# EAGLE board RH013.1 (EAGLE 7.1.0)
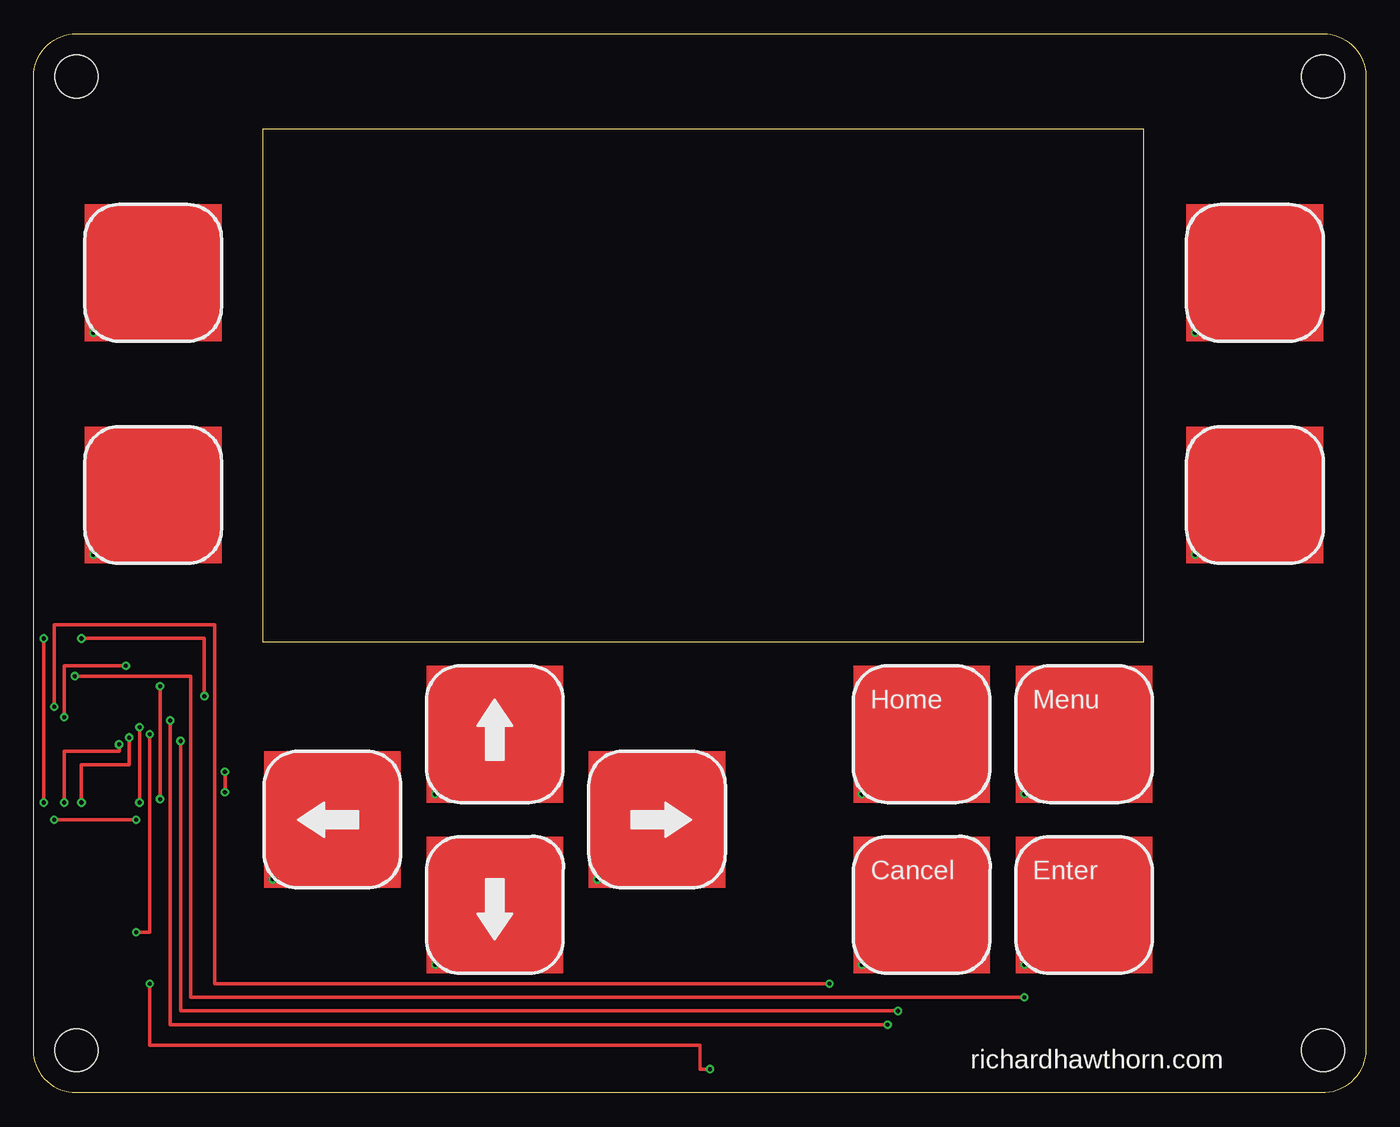
[diagram p0: board, top side]
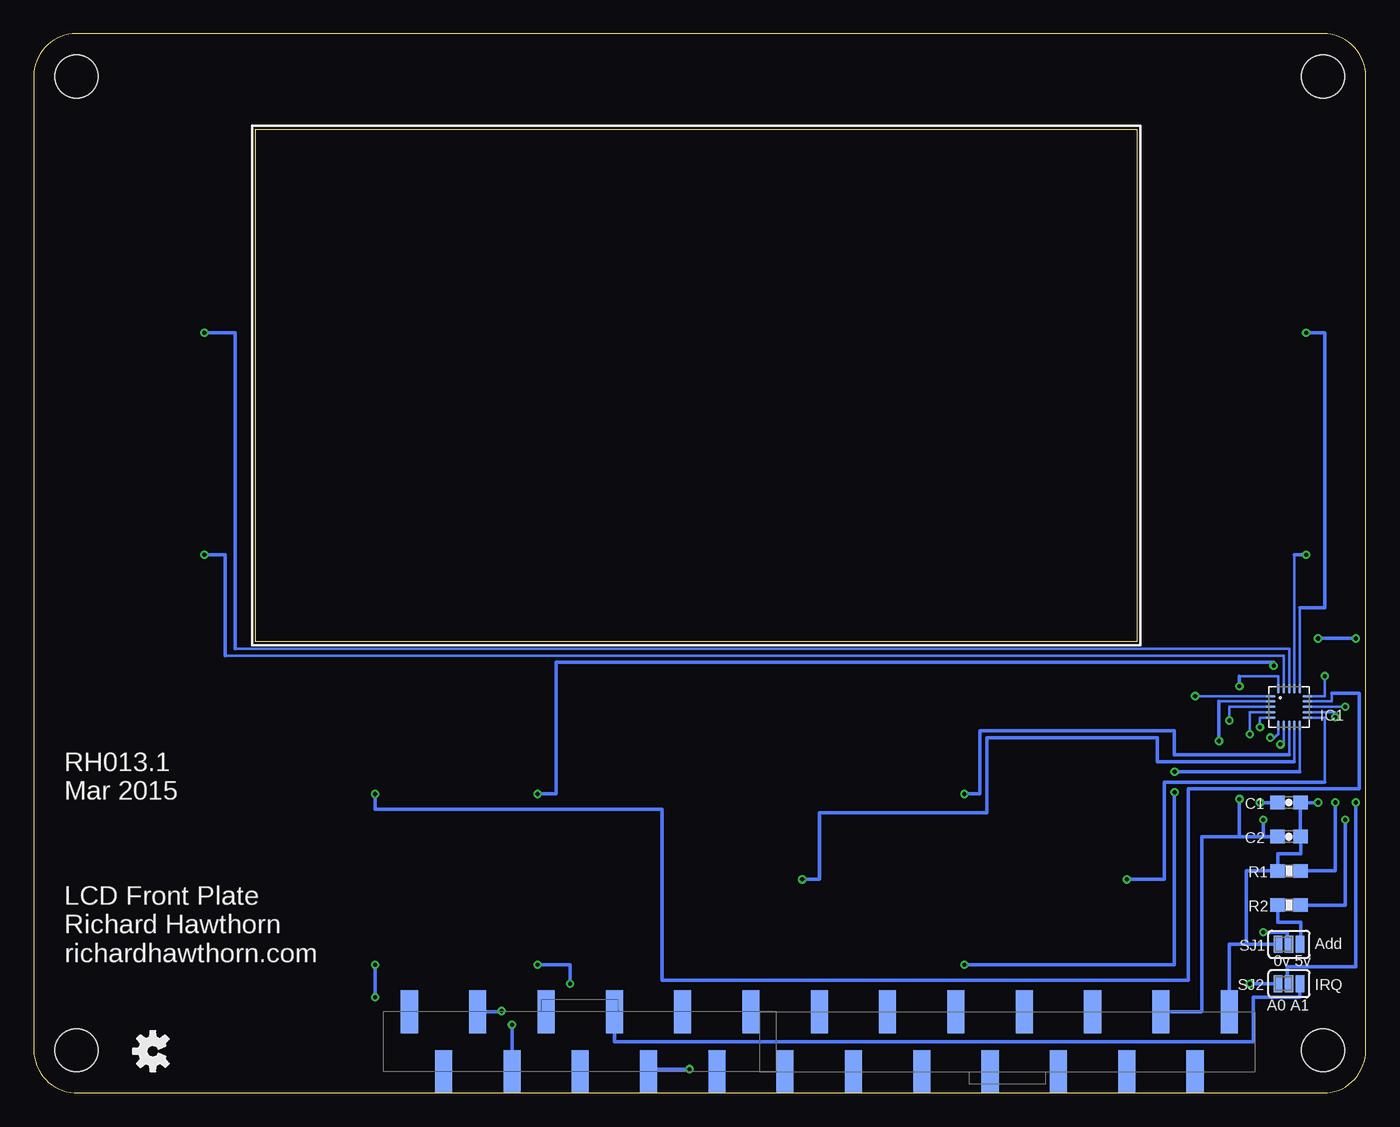
[diagram p1: board, bottom side, seen from below]

Size 99.06 x 78.74 mm. Coordinates in mm from the lower left corner, seen from the top.
Outline: 0,3.17 0,75.56 arc-90 3.17,78.74 95.89,78.74 arc-90 99.06,75.56 99.06,3.17 arc-90 95.76,0 3.17,0 arc-90 0,3.17
Outline: 17.02,71.63 17.02,33.53 82.56,33.53 82.56,71.63 17.02,71.63
Copper layers (1*16): Top 0.035mm / dielectric 1.5mm / Bottom 0.035mm
Design rules "ITEADstudio_DRC *": minimum track width 12mil, minimum drill 12mil, track to track 6mil, track to pad 6mil, pad to pad 6mil, via to via 6mil, smd to smd 0mil, copper to edge 10mil, drill to drill 10mil, minimum pad ring 10mil, minimum via ring 6mil, stop-mask expansion 2mil, vias tented up to drill 100mil, thermal gap 15mil
Net classes: 1 power: width 0.381 mm, clearance 0.254 mm
Holes 3.2 mm at 3.17,3.17 95.89,3.17 3.17,75.56 95.89,75.56
tRestrict: area 24.3,8.9 to 29.1,12.8; area 5.8,16.9 to 6.9,18.5; area 5.2,9.7 to 6.7,10.4
bRestrict: area 27.4,17.7 to 29.2,18.7; area 21.1,13.8 to 22.9,14.9; area 21.6,12.6 to 22.1,13.2; area 20.7,12.6 to 21.2,13.2; area 20.2,12.8 to 20.7,13.5; area 20.1,13.4 to 20.6,14; area 26.5,18.9 to 27.1,19.5; area 26.5,17.9 to 27.1,18.5; area 27.5,19.1 to 28,19.8; area 27.9,18.8 to 29.1,19.6

## Footprints (pad centres in the part's own frame; a part is rotated, then mirrored left to right if it is on the bottom)
0603-CAP = smd 1.1 x 1: 1 -0.85,0; 2 0.85,0
QFN-20-0.4MM-V2 = smd 0.75 x 0.195: 1 -1.367,0.8; 2 -1.367,0.4; 3 -1.367,0; 4 -1.367,-0.4; 5 -1.367,-0.8; 11 1.375,-0.8; 12 1.375,-0.4; 13 1.375,0; 14 1.375,0.4; 15 1.375,0.8 | smd 0.195 x 0.75: 6 -0.795,-1.372; 7 -0.395,-1.372; 8 0.005,-1.372; 9 0.405,-1.372; 10 0.805,-1.372; 16 0.81,1.372; 17 0.41,1.372; 18 0.01,1.372; 19 -0.39,1.372; 20 -0.79,1.372
0603-RES = smd 1.1 x 1: 1 -0.85,0; 2 0.85,0
SJ_3_PASTE1&2 = smd 0.635 x 1.27: 1 -0.813,0; 2 0,0; 3 0.813,0
74099-14 = smd 1.27 x 3.175: 1 -16.51,-2.223; 2 -13.97,2.223; 3 -11.43,-2.223; 4 -8.89,2.223; 5 -6.35,-2.223; 6 -3.81,2.223; 7 -1.27,-2.223; 8 1.27,2.223; 9 3.81,-2.223; 10 6.35,2.223; 11 8.89,-2.223; 12 11.43,2.223; 13 13.97,-2.223; 14 16.51,2.223
74099-11 = smd 1.27 x 3.175: 1 -12.7,-2.223; 2 -10.16,2.223; 3 -7.62,-2.223; 4 -5.08,2.223; 5 -2.54,-2.223; 6 0,2.223; 7 2.54,-2.223; 8 5.08,2.223; 9 7.62,-2.223; 10 10.16,2.223; 11 12.7,-2.223

## Placement (x,y rotation side)
C1  0.1uF  [0603-CAP]  5.71,21.59 0 bottom
C2  0.1uF  [0603-CAP]  5.71,19.05 0 bottom
IC1  MPR121  [QFN-20-0.4MM-V2]  5.71,28.7 0 bottom
R1  75k  [0603-RES]  5.71,16.51 0 bottom
R2  10K  [0603-RES]  5.71,13.97 0 bottom
SJ1  [SJ_3_PASTE1&2]  5.71,11.05 0 bottom
SJ2  [SJ_3_PASTE1&2]  5.71,8.13 0 bottom
U$3  [OSHW-LOGO-S]  90.2,3.1 90 bottom
X1  C-GRID-14-74099  [74099-14]  26.67,3.81 0 bottom
X2  C-GRID-11-74099  [74099-11]  58.42,3.81 180 bottom

## Library data of the parts
C1 C2 = SparkFun-Capacitors; PROD_ID: CAP-00810
IC1 = SparkFun-Sensors
R1 = SparkFun
R2 = SparkFun-Resistors; PROD_ID: RES-00824
SJ1 SJ2 = SparkFun-Passives
U$3 = SparkFun-Aesthetics
X1 X2 = con-molex; OC_FARNELL: unknown; OC_NEWARK: unknown

## Nets
3.3V: C2.1 IC1.20 R2.2 X1.12
A0: SJ2.1 X2.4
A1: SJ2.3 X2.5
A2: X2.6
A3: X2.7
A4_SDA: IC1.3 X2.8
A5_SCL: IC1.2 X2.9
A6: X2.10
A7: X2.11
D0_RX: X1.11
D1_TX: X1.10
D2: X1.9
D3: X1.8
D4: X1.7
D5: X1.6
D6: X1.5
D7: X1.4
D8: X1.3
D9: X1.2
D10_SS: X1.1
D11_MOSI: X2.1
D12_MISO: X2.2
D13_SCK: X2.3
GND [power]: C1.2 C2.2 IC1.6 R1.1 SJ1.1 X1.14
KEY0: IC1.8
KEY1: IC1.9
KEY2: IC1.10
KEY3: IC1.11
KEY4: IC1.12
KEY5: IC1.13
KEY6: IC1.14
KEY7: IC1.15
KEY8: IC1.16
KEY9: IC1.17
KEY10: IC1.18
KEY11: IC1.19
N$1: IC1.4 SJ1.2
N$2: R2.1 SJ1.3
PWR [power]: X1.13
REXT: IC1.7 R1.2
VREG: C1.1 IC1.5
~IRQ: IC1.1 SJ2.2

## Tracks (layer width: path | path; a pad name or v marks a point on that pad's centre or on a via)
3.3V  (via drill 0.3)
  Top 0.254: v9.4,21.84 v9.4,30.23 | v1.52,20.32 v7.62,20.32
  Bottom 0.203: 9.4,30.99 6.5,30.99 IC1.20
  Bottom 0.254: X1.12 12.19,6.03 12.19,19.05 9.4,19.05 | C2.1 7.62,19.05 | 7.62,19.05 9.4,19.05 | 9.4,19.05 v9.4,21.84 | v9.4,30.23 9.4,30.99 | R2.2 1.52,13.97 v1.52,20.32 | v7.62,20.32 7.62,19.05
A0  (via drill 0.3)
  Top 0.254: v50.29,1.78 49.53,1.78 49.53,3.56 8.64,3.56 v8.64,8.13
  Bottom 0.254: X2.4 53.34,1.78 v50.29,1.78 | v8.64,8.13 SJ2.1
A1
  Bottom 0.254: X2.5 55.88,3.81 8.38,3.81 8.38,7.11 4.9,7.11 SJ2.3
A4_SDA  (via drill 0.3)
  Top 0.254: v63.5,5.08 10.16,5.08 v10.16,27.69
  Bottom 0.203: v10.16,27.69 10.16,28.7 IC1.3
  Bottom 0.254: X2.8 v63.5,5.08
A5_SCL  (via drill 0.3)
  Top 0.254: v64.26,6.1 10.92,6.1 v10.92,26.16
  Bottom 0.203: 10.92,29.1 IC1.2
  Bottom 0.254: X2.9 64.26,6.03 v64.26,6.1 | v10.92,26.16 10.92,29.1
GND  (via drill 0.3)
  Top 0.254: v3.56,21.59 3.56,24.38 7.11,24.38 v7.11,26.42
  Bottom 0.203: 6.86,26.42 6.51,26.67 IC1.6
  Bottom 0.254: X1.14 10.16,11.05 8.89,11.05 | SJ1.1 8.89,11.05 | 8.89,11.05 8.89,16.51 R1.1 6.57,17.78 4.83,17.78 4.83,19.05 C2.2 C1.2 v3.56,21.59 | v7.11,26.42 6.86,26.42
KEY0  (via drill 0.3)
  Bottom 0.203: 5.71,25.15 IC1.8
  Bottom 0.254: v29.84,22.23 28.7,22.23 28.7,26.92 14.22,26.92 14.22,25.15 5.71,25.15
KEY1  (via drill 0.3)
  Bottom 0.203: 5.31,24.64 IC1.9
  Bottom 0.254: v41.91,15.88 40.64,15.88 40.64,20.83 28.19,20.83 28.19,26.42 15.49,26.42 15.49,24.64 5.31,24.64
KEY2  (via drill 0.3)
  Top 0.254: v14.22,22.35 v14.22,23.88
  Bottom 0.203: 4.91,23.88 IC1.10
  Bottom 0.254: v29.84,9.53 14.22,9.53 v14.22,22.35 | v14.22,23.88 4.91,23.88
KEY3  (via drill 0.3)
  Bottom 0.203: 3.05,23.11 3.05,27.9 IC1.11
  Bottom 0.254: v17.78,15.88 14.99,15.88 14.99,23.11 3.05,23.11
KEY4  (via drill 0.3)
  Top 0.254: v6.86,31.75 2.29,31.75 v2.29,27.94
  Bottom 0.203: 2.31,27.94 2.31,28.3 IC1.12
  Bottom 0.254: v61.59,22.23 60.2,22.23 60.2,32 6.86,32 v6.86,31.75 | v2.29,27.94 2.31,27.94
KEY5  (via drill 0.3)
  Top 0.254: v59.18,8.13 13.46,8.13 13.46,34.8 1.52,34.8 v1.52,28.7
  Bottom 0.203: v1.52,28.7 IC1.13
  Bottom 0.254: v61.59,9.53 59.18,9.53 v59.18,8.13
KEY6  (via drill 0.3)
  Bottom 0.203: 2.54,29.72 2.54,29.1 IC1.14
  Bottom 0.254: v73.66,22.23 73.66,21.08 52.32,21.08 52.32,8.38 13.21,8.38 13.21,22.61 0.51,22.61 0.51,29.72 2.54,29.72
KEY7  (via drill 0.3)
  Top 0.254: v73.66,7.11 11.68,7.11 11.68,30.99 v3.05,30.99
  Bottom 0.203: v3.05,30.99 3.05,29.5 IC1.15
  Bottom 0.254: v73.66,9.53 v73.66,7.11
KEY8  (via drill 0.3)
  Bottom 0.203: 4.91,36.07 IC1.16
  Bottom 0.254: v4.45,56.52 3.05,56.52 3.05,36.07 4.91,36.07
KEY9  (via drill 0.3)
  Bottom 0.203: 5.3,40.01 IC1.17
  Bottom 0.254: v4.45,40.01 5.3,40.01
KEY10  (via drill 0.3)
  Bottom 0.203: 84.07,33.02 5.71,33.02 IC1.18
  Bottom 0.254: v86.36,56.52 84.07,56.52 84.07,33.02
KEY11  (via drill 0.3)
  Bottom 0.203: 84.84,32.51 6.11,32.51 IC1.19
  Bottom 0.254: v86.36,40.01 84.84,40.01 84.84,32.51
N$1  (via drill 0.3)
  Top 0.254: v7.62,11.94 8.64,11.94 v8.64,26.67
  Bottom 0.203: v8.64,26.67 8.64,28.3 IC1.4
  Bottom 0.254: SJ1.2 5.84,10.79 5.84,11.94 v7.62,11.94
N$2
  Bottom 0.254: SJ1.3 4.83,10.79 4.83,12.7 6.57,12.7 R2.1
REXT  (via drill 0.3)
  Top 0.254: v2.29,21.59 2.29,25.4 6.35,25.4 v6.35,25.91
  Bottom 0.203: v6.35,25.91 6.11,25.91 IC1.7
  Bottom 0.254: R1.2 2.29,16.51 v2.29,21.59
VREG  (via drill 0.3)
  Top 0.254: v7.87,21.59 v7.87,27.18
  Bottom 0.203: v7.87,27.18 7.87,27.9 IC1.5
  Bottom 0.254: C1.1 v7.87,21.59
~IRQ  (via drill 0.3)
  Top 0.254: v0.76,21.59 v0.76,33.78 | v3.56,33.78 12.7,33.78 v12.7,29.5
  Bottom 0.203: v12.7,29.5 IC1.1
  Bottom 0.254: SJ2.2 5.84,7.62 5.84,9.4 0.76,9.4 v0.76,21.59 | v0.76,33.78 v3.56,33.78
(copper drawn outside any net)
  shapes: Top area x12

## Text on the board
tNames: Home | Menu | Cancel | Enter | richardhawthorn.com
bNames: RH013.1 / Mar 2015 | Add | LCD Front Plate / Richard Hawthorn / richardhawthorn.com | 0v 5v | IRQ | A0 A1
tDocu: REG